# EAGLE board Power Bus (EAGLE 9.6.2)
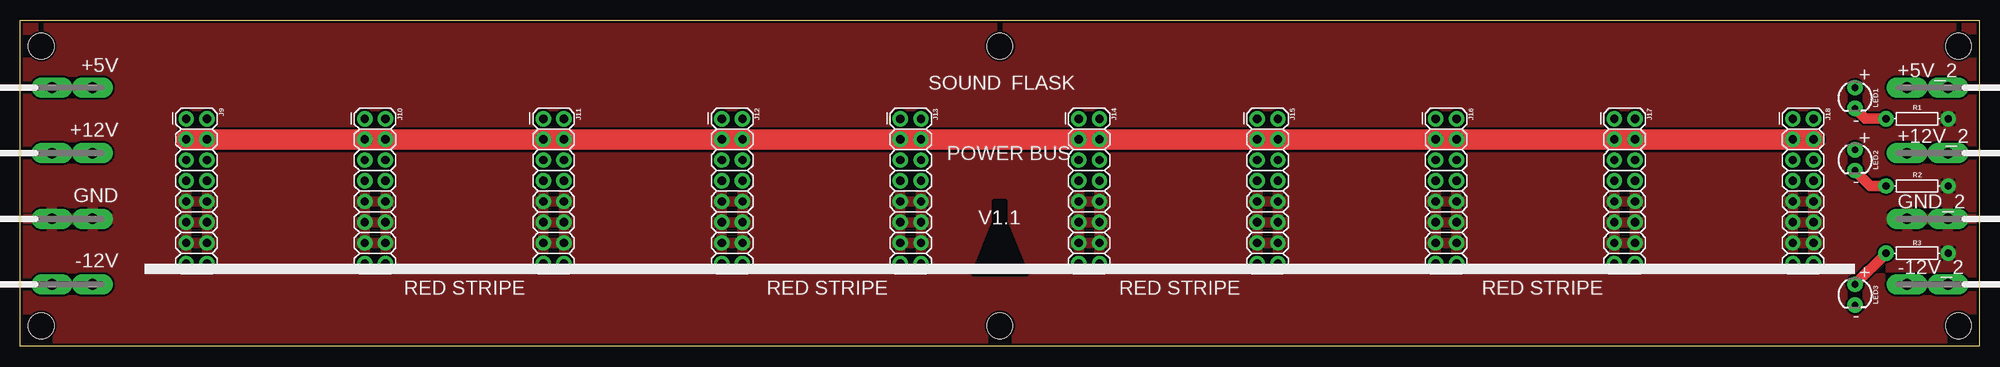
[diagram p0: board, top side]
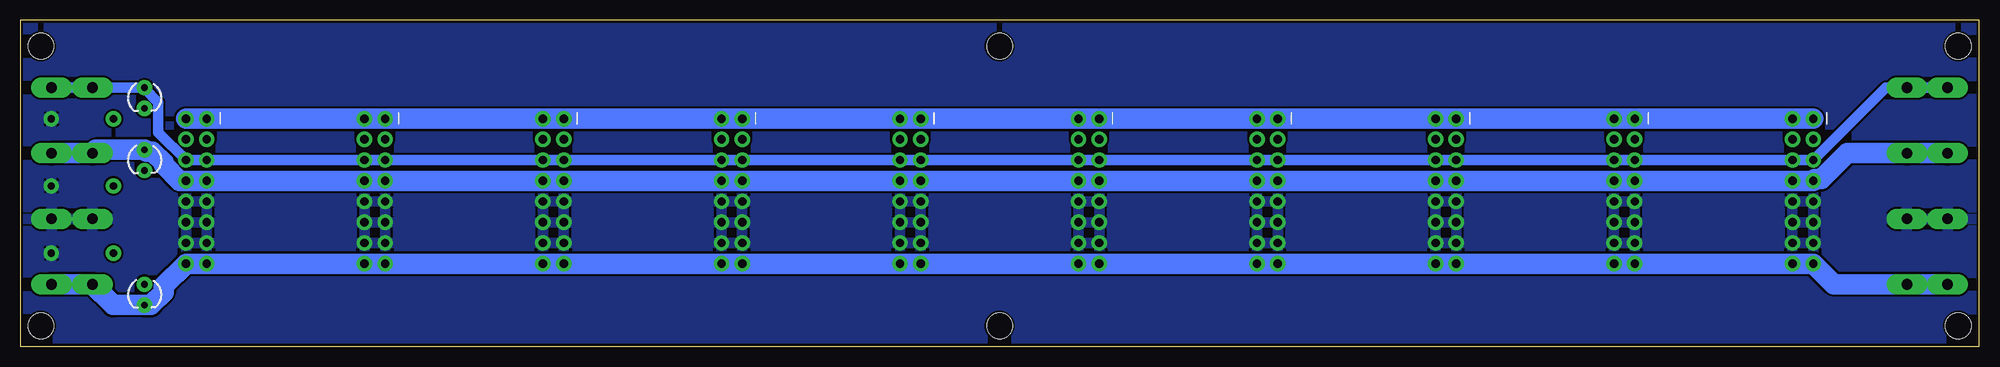
[diagram p1: board, bottom side, seen from below]

Size 240 x 40 mm. Coordinates in mm from the lower left corner, seen from the top.
Outline: 0,0 0,40 240,40 240,0 0,0
Copper layers (1*16): Top 0.035559375mm / dielectric 1.6mm / Bottom 0.035559375mm
Design rules "jlcpcb2layer": minimum track width 5mil, minimum drill 12mil, track to track 5mil, track to pad 5mil, pad to pad 5mil, via to via 5mil, smd to smd 5mil, copper to edge 8mil, drill to drill 6mil, minimum pad ring 5mil, minimum via ring 3mil, stop-mask expansion 2.5mil, vias tented up to drill 0mil, thermal gap 10mil
Holes 3.17 mm at 2.54,36.83 2.54,2.54 120.02,36.83 120.02,2.54 237.49,2.54 237.49,36.83
tRestrict: area 116.8,8.9 to 123.2,17.8

## Footprints (pad centres in the part's own frame; a part is rotated, then mirrored left to right if it is on the bottom)
F061.200 = drill 1.3 pad 2.5 long: 1A -2.5,0; 1B 2.5,0
2X8 = drill 1.016 pad 1.88: 1 0,0; 2 0,2.54; 3 2.54,0; 4 2.54,2.54; 5 5.08,0; 6 5.08,2.54; 7 7.62,0; 8 7.62,2.54; 9 10.16,0; 10 10.16,2.54; 11 12.7,0; 12 12.7,2.54; 13 15.24,0; 14 15.24,2.54; 15 17.78,0; 16 17.78,2.54
LED_3MM = drill 0.813 pad 1.88: A -1.27,0; K 1.27,0
AXIAL-0.3 = drill 0.9 pad 1.88: P$1 -3.81,0; P$2 3.81,0

## Placement (x,y rotation side)
+5V  PIN2F061.200  [F061.200]  6.35,31.75 180 top
+5V_2  PIN2F061.200  [F061.200]  233.68,31.75 0 top
+12V  PIN2F061.200  [F061.200]  6.35,23.71 180 top
+12V_2  PIN2F061.200  [F061.200]  233.68,23.71 0 top
-12V  PIN2F061.200  [F061.200]  6.35,7.62 180 top
-12V_2  PIN2F061.200  [F061.200]  233.68,7.62 0 top
GND  PIN2F061.200  [F061.200]  6.35,15.66 180 top
GND_2  PIN2F061.200  [F061.200]  233.68,15.66 0 top
J9  [2X8]  20.32,27.94 270 top
J10  [2X8]  42.19,27.94 270 top
J11  [2X8]  64.06,27.94 270 top
J12  [2X8]  85.94,27.94 270 top
J13  [2X8]  107.81,27.94 270 top
J14  [2X8]  129.68,27.94 270 top
J15  [2X8]  151.55,27.94 270 top
J16  [2X8]  173.43,27.94 270 top
J17  [2X8]  195.3,27.94 270 top
J18  [2X8]  217.17,27.94 270 top
LED1  [LED_3MM]  224.79,30.48 270 top
LED2  [LED_3MM]  224.79,22.86 270 top
LED3  [LED_3MM]  224.79,6.35 270 top
R1  1k  [AXIAL-0.3]  232.41,27.94 0 top
R2  1k  [AXIAL-0.3]  232.41,19.68 0 top
R3  1k  [AXIAL-0.3]  232.41,11.43 180 top

## Library data of the parts
+5V +5V_2 +12V +12V_2 -12V -12V_2 GND GND_2 = my-library; OC_FARNELL: unknown; OC_NEWARK: unknown
J9-J18 = my-library
LED1-LED3 = my-library; PROD_ID: DIO-08794
R1-R3 = my-library; PROD_ID: RES-08380

## Nets
+5V: +5V.1A +5V.1B +5V_2.1A +5V_2.1B J9.5 J9.6 J10.5 J10.6 J11.5 J11.6 J12.5 J12.6 J13.5 J13.6 J14.5 J14.6 J15.5 J15.6 J16.5 J16.6 J17.5 J17.6 J18.5 J18.6 LED1.A
+12V: +12V.1A +12V.1B +12V_2.1A +12V_2.1B J9.7 J9.8 J10.7 J10.8 J11.7 J11.8 J12.7 J12.8 J13.7 J13.8 J14.7 J14.8 J15.7 J15.8 J16.7 J16.8 J17.7 J17.8 J18.7 J18.8 LED2.A
-12V: -12V.1A -12V.1B -12V_2.1A -12V_2.1B J9.15 J9.16 J10.15 J10.16 J11.15 J11.16 J12.15 J12.16 J13.15 J13.16 J14.15 J14.16 J15.15 J15.16 J16.15 J16.16 J17.15 J17.16 J18.15 J18.16 LED3.K
CV: J9.1 J9.2 J10.1 J10.2 J11.1 J11.2 J12.1 J12.2 J13.1 J13.2 J14.1 J14.2 J15.1 J15.2 J16.1 J16.2 J17.1 J17.2 J18.1 J18.2
GATE: J9.3 J9.4 J10.3 J10.4 J11.3 J11.4 J12.3 J12.4 J13.3 J13.4 J14.3 J14.4 J15.3 J15.4 J16.3 J16.4 J17.3 J17.4 J18.3 J18.4
GND: GND.1A GND.1B GND_2.1A GND_2.1B J9.9 J9.10 J9.11 J9.12 J9.13 J9.14 J10.9 J10.10 J10.11 J10.12 J10.13 J10.14 J11.9 J11.10 J11.11 J11.12 J11.13 J11.14 J12.9 J12.10 J12.11 J12.12 J12.13 J12.14 J13.9 J13.10 J13.11 J13.12 J13.13 J13.14 J14.9 J14.10 J14.11 J14.12 J14.13 J14.14 J15.9 J15.10 J15.11 J15.12 J15.13 J15.14 J16.9 J16.10 J16.11 J16.12 J16.13 J16.14 J17.9 J17.10 J17.11 J17.12 J17.13 J17.14 J18.9 J18.10 J18.11 J18.12 J18.13 J18.14 R1.P$2 R2.P$2 R3.P$1
N$1: LED1.K R1.P$1
N$2: LED2.K R2.P$1
N$6: LED3.A R3.P$2

## Tracks (layer width: path | path; a pad name or v marks a point on that pad's centre or on a via)
+5V
  Bottom 1.27: +5V.1B +5V.1A 11.43,31.75 J9.5 J9.6 J10.5 J10.6 J11.5 J11.6 J12.5 J12.6 J13.5 J13.6 J14.5 J14.6 J15.5 J15.6 J16.5 J16.6 J17.5 J17.6 J18.5 J18.6 223.09,26.24 223.09,29.91 224.79,31.62 LED1.A +5V_2.1A | +5V_2.1A | +5V_2.1A +5V_2.1B
+12V
  Bottom 2.54: +12V_2.1B +12V_2.1A 230.76,24.13 LED2.A 224.59,23.93 223.82,23.93 222.45,22.56 222.45,22.3 220.47,20.32 J18.8 J18.7 J17.8 J17.7 J16.8 J16.7 J15.8 J15.7 J14.8 J14.7 J13.8 J13.7 J12.8 J12.7 J11.8 J11.7 J10.8 J10.7 J9.8 J9.7 20.12,20.52 19.35,20.52 16.17,23.71 +12V.1A +12V.1B
-12V
  Bottom 2.54: -12V.1B -12V.1A 17.78,7.62 J9.15 J9.16 J10.15 J10.16 J11.15 J11.16 J12.15 J12.16 J13.15 J13.16 J14.15 J14.16 J15.15 J15.16 J16.15 J16.16 J17.15 J17.16 J18.15 J18.16 222.45,7.42 222.45,6.65 224.03,5.08 LED3.K 228.64,5.08 -12V_2.1A -12V_2.1B
CV
  Bottom 2.54: J18.2 J18.1 J17.2 J17.1 J16.2 J16.1 J15.2 J15.1 J14.2 J14.1 J13.2 J13.1 J12.2 J12.1 J11.2 J11.1 J10.2 J10.1 J9.2 J9.1
GATE
  Top 2.54: J9.3 J9.4 J10.3 J10.4 J11.3 J11.4 J12.3 J12.4 J13.3 J13.4 J14.3 J14.4 J15.3 J15.4 J16.3 J16.4 J17.3 J17.4 J18.3 J18.4
GND
  pour Bottom (isolate 0.254): 0,0 0,39.37 240.03,39.37 240.03,0
  pour Top (isolate 0.254): 0,0 0,39.37 240.03,39.37 240.03,0
N$1
  Top 1.27: LED1.K 226.06,27.94 R1.P$1
N$2
  Top 1.27: LED2.K 226.69,19.68 R2.P$1
N$6
  Top 1.27: LED3.A R3.P$2

## Text on the board
tPlace: SOUND | FLASK | POWER BUS | V1.1 | RED STRIPE | RED STRIPE | RED STRIPE | RED STRIPE
tNames: + | - | + | - | + | -